# Altium PCB PCB2.PcbDoc
Units mil, origin at the board's own origin, x right, y up, seen from the top; angles counter-clockwise.
Board outline 3500 x 2000 mil, 2 copper layers (Top Layer, Bottom Layer), stack 61.756 mil thick; 18 components, 11 nets, 49 pads, 11 vias.
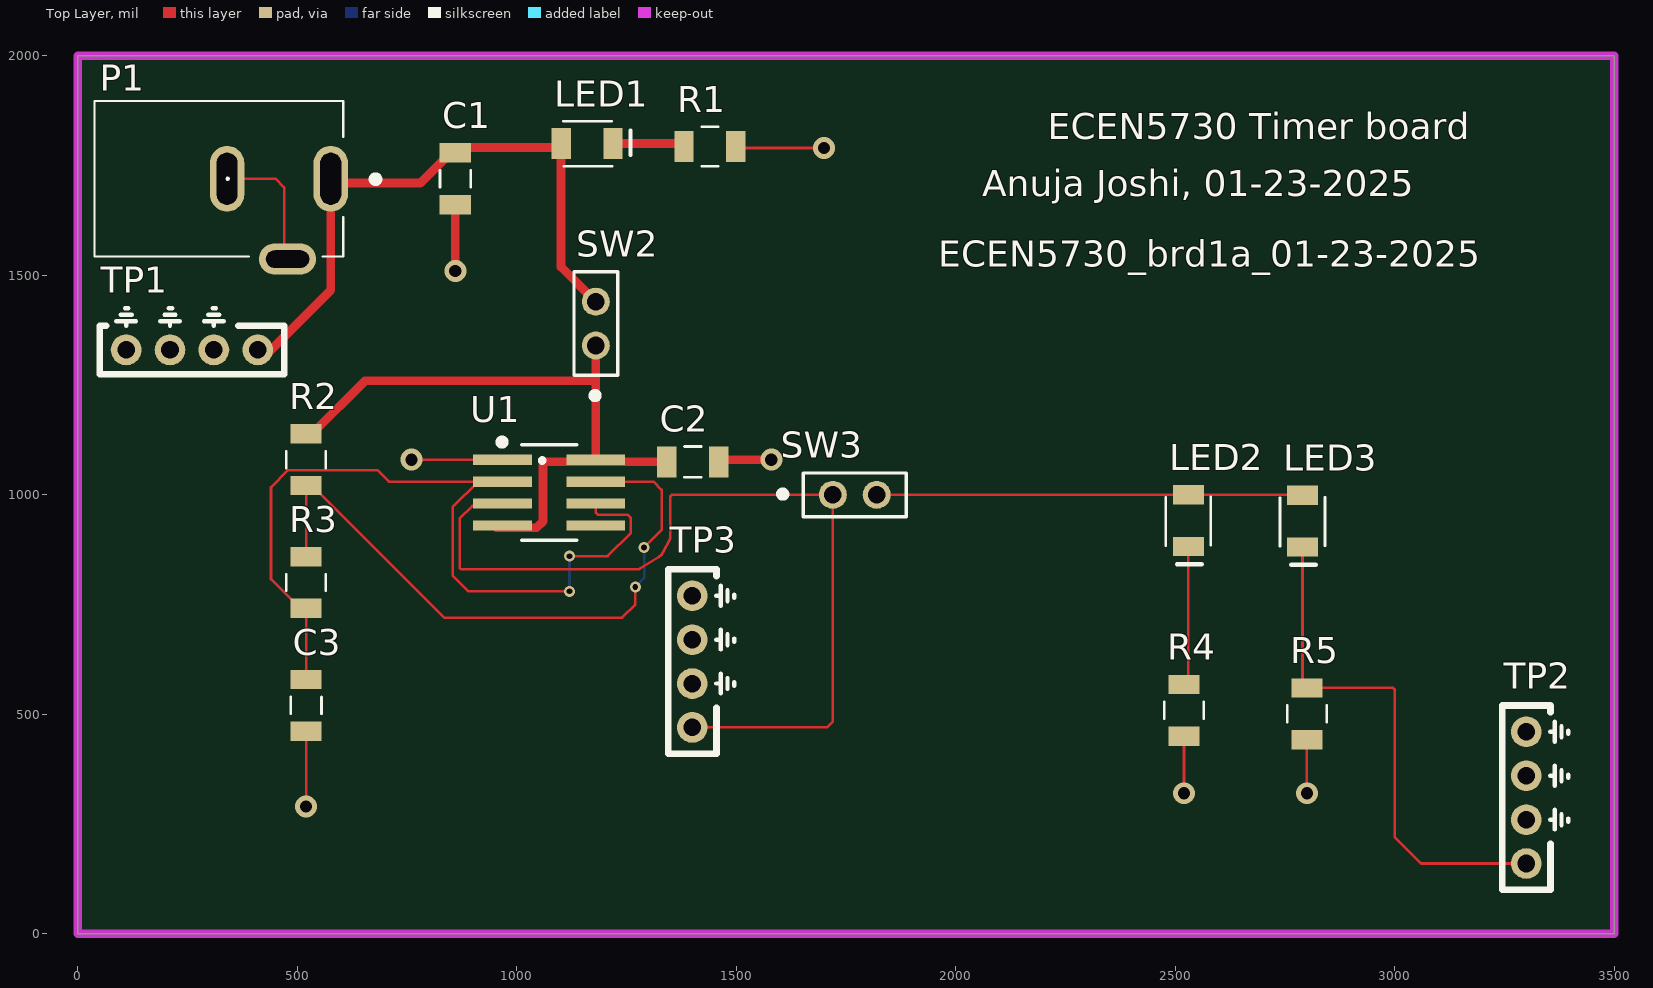
[diagram p0: Top Layer view]
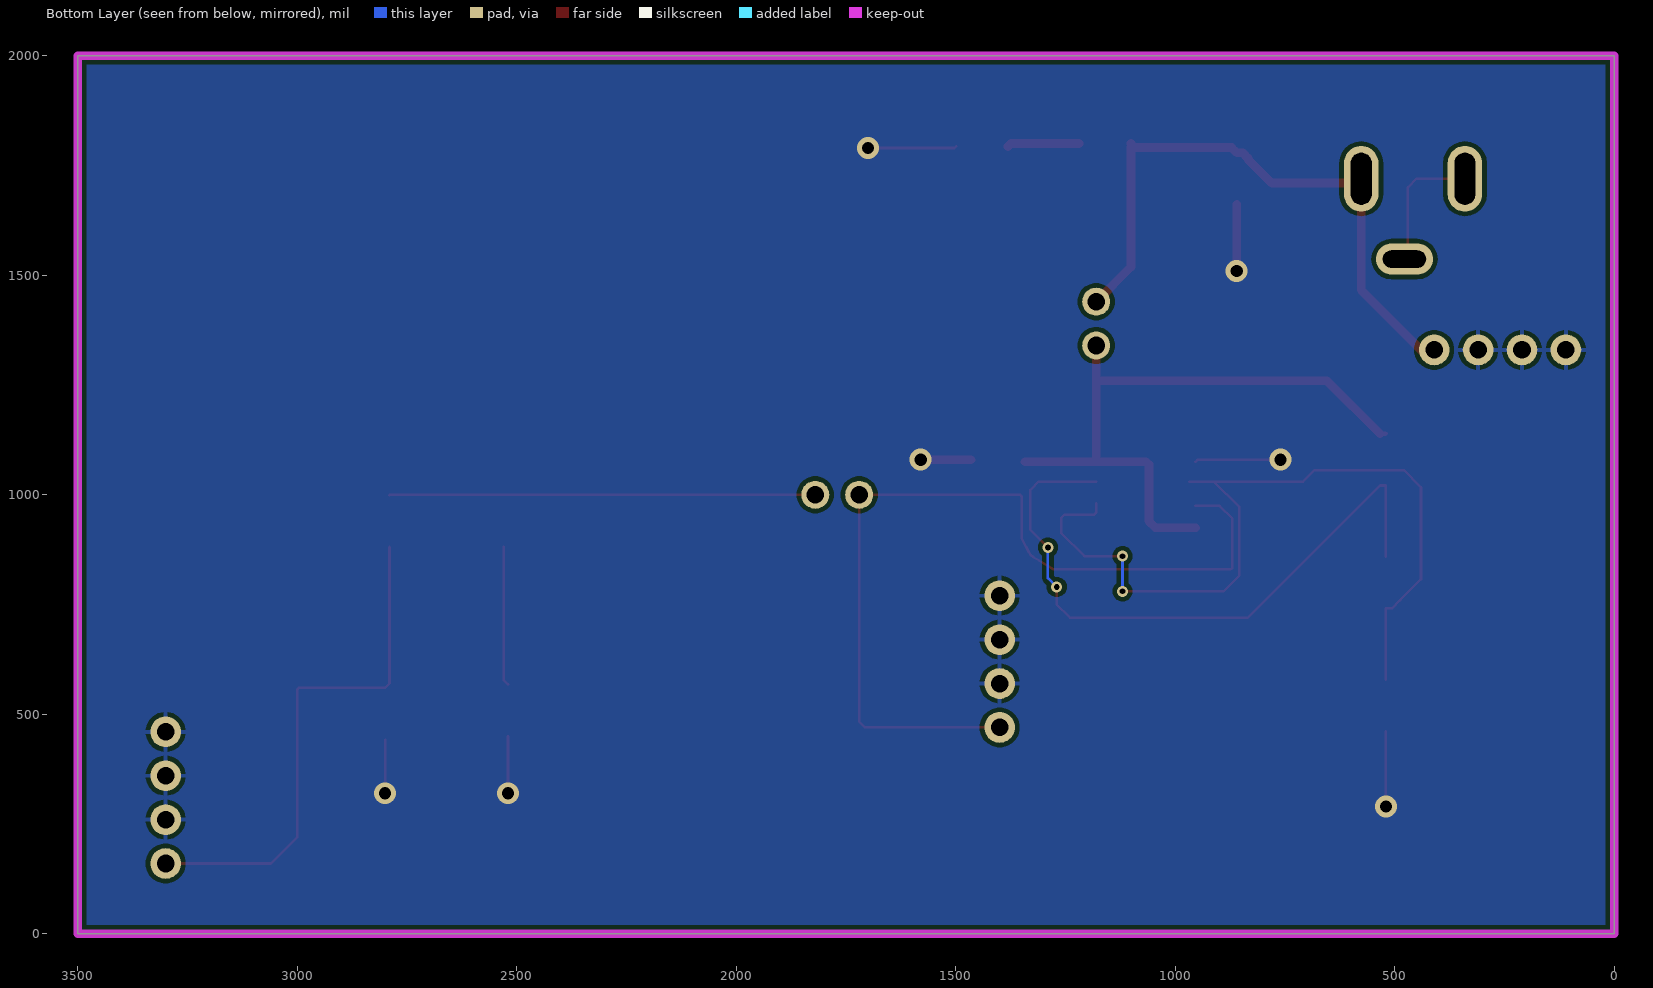
[diagram p1: Bottom Layer view, seen from below]
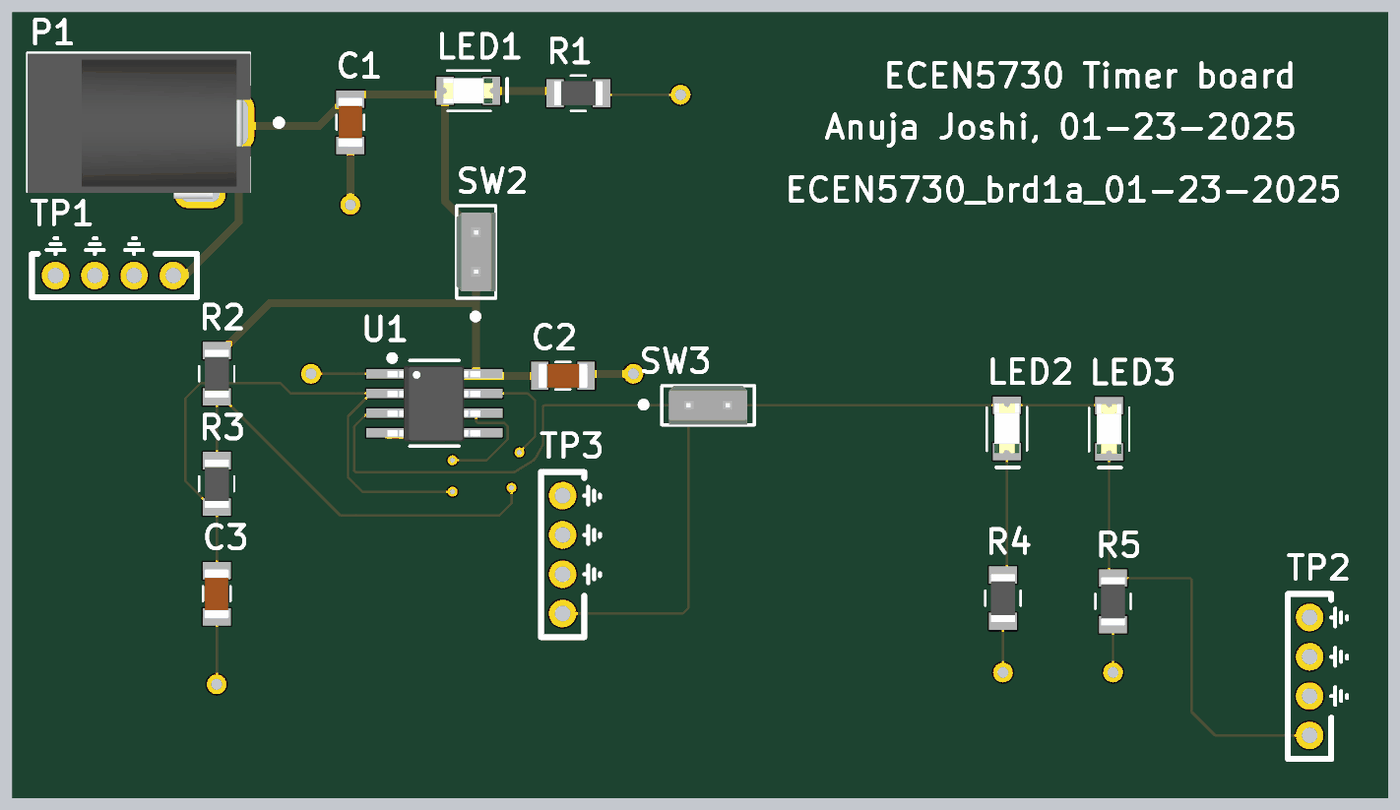
[diagram p2: 3D render of the assembled board from above, using the file's embedded part models]

## Layer stack, top to bottom
Top Solder: solder mask 1, SM-001, Dk 4
Top Layer: signal copper 1.378
Dielectric 1: core 59, Core-043, Dk 4.3
Bottom Layer: signal copper 1.378
Bottom Solder: solder mask 1, SM-001, Dk 4

## Board outline
0,0 3500,0 3500,2000 0,2000

## Design rules (kind name [scope] priority, off if disabled: settings)
BoardOutlineClearance [All] p1: gap=10 ignorepadtopadclearanceinfootprint=FALSE except(0: Arc-SplitContinuation Track-SplitContinuation SMDPad-SplitContinuation THPad-SplitContinuation Via-SplitContinuation Fill-SplitContinuation Poly-SplitContinuation Region-SplitContinuation Text-SplitContinuation)
Clearance [All] p1: gap=10 ignorepadtopadclearanceinfootprint=FALSE
PlaneClearance [All] p1: clearance=10
PlaneConnect [All] p1: planeconnectstyle=Direct reliefexpansion=20 reliefentries=4 reliefconductorwidth=10 reliefairgap=10
PolygonConnect [All] p1: thpad.connectstyle=Relief thpad.reliefconductorwidth=10 thpad.reliefentries=4 thpad.polygonreliefangle="90 Angle" thpad.airgapwidth=10 smdpad.connectstyle=Direct smdpad.reliefconductorwidth=10 smdpad.reliefentries=4 smdpad.polygonreliefangle="90 Angle" smdpad.airgapwidth=10 via.connectstyle=Direct via.reliefconductorwidth=10 via.reliefentries=4 via.polygonreliefangle="90 Angle" via.airgapwidth=10
RoutingVias [All] p1: holewidth=13 width=25 viastyle="Through Hole" minholewidth=13 minwidth=25 maxholewidth=60 maxwidth=80
SolderMaskExpansion [All] p1: expansion=4 istentingtop=FALSE
SupplyNets "Schematic Supply Nets_1" [InNet('+5')] p1: voltage=0.000
SupplyNets "Schematic Supply Nets" [InNet('GND')] p2: voltage=0.000
UnRoutedNet [All] p1: checkbadconnections=TRUE
Width "Schematic Width Constraint_1" [InNet('+5')] p1: maxlimit=100 minlimit=10 preferedwidth=20 minimp=50.000000 maximp=50.000000 favimp=50.000000
Width "Schematic Width Constraint" [InNet('NetC2_1')] p2: maxlimit=100 minlimit=10 preferedwidth=20 minimp=50.000000 maximp=50.000000 favimp=50.000000
Width [All] p3: maxlimit=100 minlimit=6 preferedwidth=6 minimp=50.000000 maximp=50.000000 favimp=50.000000
27 further rules are at their usual default settings.

## Components (designator, comment, footprint, x,y, rotation, side; value= is the part's Value field where it differs from the comment)
C1 "22uF" 1206_Passive_Capacitor 860,1720 r90 top
C2 "22uF" 1206_Passive_Capacitor 1401,1075 r0 top
C3 "1uF" 1206_Passive_Capacitor 520,520.31 r90 top
LED1 "Red" LED_1206 1160,1800 r0 top
LED2 "Red" LED_1206 2530,941 r270 top
LED3 "Red" LED_1206 2790,940 r270 top
P1 "Power Jack" Power_Jack 576.22,1720 r180 top value="CONN PWR JACK 2X5.5MM SOLDER"
R1 "1k" 1206_Passive_Resitor 1440,1793.7 r180 top value="1K Ohm"
R2 "1k" 1206_Passive_Resitor 520,1080 r90 top value="1K Ohm"
R3 "1k" 1206_Passive_Resitor 520,800.16 r90 top value="1K Ohm"
R4 "1k" 1206_Passive_Resitor 2520,509 r90 top value="1K Ohm"
R5 "300 Ohm" 1206_Passive_Resitor 2800,501 r90 top value=300Ohm
SW2 "SW_2Pin_100mil_Switch" 2Pin-Header-Conn 1180,1340 r90 top
SW3 "SW_2Pin_100mil_Switch" 2Pin-Header-Conn 1720,1000 r0 top
TP1 "TP_5V" TP10x_Probe 260,1330 r180 top
TP2 "10x Probe TP" TP10x_Probe 3300,310 r90 top
TP3 "10x Probe TP" TP10x_Probe 1400,620 r90 top
U1 "LMC555CMX/NOPB" TS555IDTTR 1073.7,1005 r0 top

## Footprints (in the part's own frame and the unit in brackets; to place one, negate y for a bottom-side part, rotate by r counter-clockwise, add the part's x,y. Pads: shape width x height; smd on the part's side, far side on the other; paste and mask are expansions set on the pad)
2Pin-Header-Conn [mm]
  round 1.62 hole 1.02: 1(0,0) 2(2.54,0)
  silkscreen extent -3.03,-1.27 4.26,1.26, body extent -1.27,-1.27 3.81,1.27, height 8.13
1206_Passive_Capacitor [mil]
  rect 44x71 smd: 1(-59,0) 2(59,0)
  silkscreen extent -19,-35 19,35, body extent -63,-31 63,32, height 50
1206_Passive_Resitor [mil]
  rect 44x71 smd: 1(-59,0) 2(59,0)
  silkscreen extent -19,-45 19,45, body extent -61,-31 61,31, height 26
LED_1206 [mil]
  rect 44x71 smd: 1(-59,0) 2(59,0)
  silkscreen extent -54,-51 99,51, body extent -63,-31 63,31, height 28
Power_Jack [mm]
  oval 2x3.8 hole 1.2 slot 3 at 90 deg: 1(0,0) 2(6,0)
  oval 3.3x1.8 hole 1 slot 2.5 at 0 deg: 3(2.5,4.65)
  silkscreen extent -2.79,-4.5 13.68,4.5, body extent -0.76,-4.45 13.64,4.95, height 11.49
TP10x_Probe [mil] "Small Probs footprint"
  round 70 hole 40: 1(-150,0) 2(-50,0) 2(50,0) 2(150,0)
  silkscreen extent -210,-95 210,55
TS555IDTTR [mm] "IC OSC Single Timer 2.7MHz 8SOIC"
  rect 3.4x0.6 smd: 1(-2.7,1.905) 2(-2.7,0.635) 3(-2.7,-0.635) 4(-2.7,-1.905) 5(2.7,-1.905) 6(2.7,-0.635) 7(2.7,0.635) 8(2.7,1.905)
  silkscreen extent -2.85,-2.77 1.6,3.05, body extent -3.03,-2.48 2.96,2.43, height 1.75

## Part data
C1 C2: library part C_22uF_1206, "22uF ±10% 25V X5R 1206 Multilayer Ceramic Capacitors MLCC - SMD/SMT RoHS", LCSC Part#=C12891, MFR Part #=CL31A226KAHNNNE, Datasheet=https://datasheet.lcsc.com/lcsc/1811031514_Samsung-Electro-Mechanics-CL31A226KAHNNNE_C12891.pdf, Type=basic
C3: library part C_1uF_0402, "MULTILAYER CERAMIC CAPACITORS MLCC - SMD/SMT 1UF 25V 0402 ROHS", LCSC Part#=C52923, MFR Part #=CL05A105KA5NQNC, Datasheet=https://datasheet.lcsc.com/szlcsc/Samsung-Electro-Mechanics-CL05A105KA5NQNC_C52923.pdf, Type=Basic
LED1 LED2 LED3: library part LED_RED_1206, "Red 621~631nm 1206 Light Emitting Diodes (LED) RoHS", LCSC Part#=C93133, MFR Part #=15-21/R6C-FQ1R1B/2T, Datasheet=https://datasheet.lcsc.com/szlcsc/1811151241_Everlight-Elec-15-21-R6C-FQ1R1B-2T_C93133.pdf, Type=Extended
P1: library part "P_Power Jack", "Power Barrel Connector Jack 2.10mm ID (0.083\"), 5.50mm OD (0.217\") Through Hole, Right Angle", LCSC Part#=C136744, MFR Part #=PJ-102A, Digikey Link=https://www.digikey.com/product-detail/en/PJ-102A/CP-102A-ND/275425/?itemSeq=304982367, Type=Extended
R1 R2 R3 R4: library part R_1K_1206, "CHIP RESISTOR - SURFACE MOUNT 1KOHMS ±1% 1/4W 1206 ROHS", LCSC Part#=C4410, MFR Part #=RNCP1206FTD1K00CT, Digikey Link=https://www.digikey.com/product-detail/en/RNCP1206FTD1K00/RNCP1206FTD1K00CT-ND/2240675/?itemSeq=304982373, Type=Basic
R5: library part R_300Ohm_1206, "CHIP RESISTOR - SURFACE MOUNT 300OHMS ±1% 1/4W 1206 ROHS", LCSC Part#=C17887, MFR Part #=1206W4F3000T5E, Datasheet=https://datasheet.lcsc.com/szlcsc/Uniroyal-Elec-1206W4F3000T5E_C17887.pdf, Type=Basic
SW2 SW3: "2Pin Header", LCSC Part#=C124375, Type=Extended
TP1 TP2 TP3: library part TP_10x_Probe, "Test Point 300 mil centers"
U1: library part U_555_Fast, "555 Type, Timer/Oscillator _Single_ IC 3MHz 8-SO", LCSC Part#=C90760, Package=SOIC-8, Digikey Link=https://www.digikey.com/product-detail/en/texas-instruments/LMC555CMX-NOPB/LMC555CMX-NOPBCT-ND/1010550, MFR Part #=LMC555CMX/NOPB, Type=Extended

## Via types
v1: diameter 50, hole 28, Top Layer to Bottom Layer, 7 vias
v2: diameter 25, hole 13, Top Layer to Bottom Layer, 4 vias

## Nets (pads, with @x,y where several pads share a name; then routed paths per layer and width w, separated by ;. In a path a pad name is that pad's centre, name@x,y a point inside that pad or via, vN(x,y) a via of type N, cw(c..) or ccw(c..) an arc to the next point about the centre after c; other vN are vias at no path point)
+5: C1.2 LED1.1 P1.1 SW2.2 TP1.1 | length 1397.8
  Top Layer w20: TP1.1@430,1320 576.22,1466.22 576.22,1710 780,1710 834.5,1764.5 834.5,1767 846.5,1779 C1.2 872,1791 1092,1791 LED1.1 ; LED1.1@1101,1791 1101,1519 SW2.2
GND: C1.1 C2.2 C3.1 R1.1 R4.1 R5.1 TP1.2 TP2.2 TP3.2 U1.1 | length 1094.7
  Top Layer w6: v1(520,290) C3.1 ; v1(760,1080) 948.7,1080 U1.1@953.7,1075 ; C2.2 C2.2@1465,1080 ; R1.1 1502.7,1790 v1(1700,1790) ; v1(2520,320) R4.1 ; v1(2800,320) R5.1
  Top Layer w20: v1(860,1510) C1.1 ; C2.2@1465,1080 v1(1580,1080)
NetC2_1: C2.1 R2.2 SW2.1 U1.4 U1.8 | length 1502
  Top Layer w10: R2.2 R2.2@533.5,1139 ; 1060,1069.14 1065.86,1075
  Top Layer w20: R2.2@533.5,1139 654.5,1260 1180,1260 ; U1.4@953.7,925 1045,925 1060,940 1060,1069.14 ; 1065.86,1075 1166.3,1075 U1.8@1178.19,1075 ; SW2.1 1180,1260 ; C2.1 U1.8@1178.19,1075 ; U1.8@1178.19,1075 1180,1076.81 1180,1260
NetC3_2: C3.2 R3.1 U1.2 U1.6 | length 1933.9
  Top Layer w6: C3.2 R3.1 506.5,741.16 487.5,760.16 440,807.66 440,1016.88 479.12,1056 682.7,1056 708.7,1030 U1.2@912.28,1030 ; U1.2 U1.2@912.28,1030 ; v2(1120,780) 890,780 854,816 854,971.72 U1.2@912.28,1030 ; v2(1120,860) 1207.12,860 1259.93,912.8 1259.93,947.2 1252.31,954.81 1184.38,954.81 1180,959.19 U1.6
  Bottom Layer w6: v2(1120,780) v2(1120,860)
NetLED1_2: LED1.2 R1.2 | length 164.6
  Top Layer w20: LED1.2 1374.7,1800 R1.2
NetLED2_1: LED2.1 LED3.1 SW3.2 | length 970.4
  Top Layer w6: SW3.2 LED2.1 2789,1000 LED3.1
NetLED2_2: LED2.2 R4.2 | length 318.1
  Top Layer w6: R4.2 2530,578 LED2.2
NetLED3_2: LED3.2 R5.2 TP2.1 | length 1187.9
  Top Layer w6: LED3.2 2790,570 R5.2 2996.49,560 3000,556.49 3000,220 3060,160 TP2.1
NetP1_2: P1.2 P1.3 | length 367.7
  Top Layer w6: P1.2@373.6,1670.79 340,1704.39 P1.2 450,1720 470,1700 470,1544.72 P1.3
NetR2_1: R2.1 R3.2 U1.7 | length 1492.7
  Top Layer w6: R3.2 R2.1 533.5,1021 834.5,720 1240,720 1270,750 v2(1270,790) ; U1.7 1311.12,1030 1330,1011.12 1330,920 v2(1290,880)
  Bottom Layer w6: v2(1270,790) 1290,810 v2(1290,880)
NetSW3_1: SW3.1 TP3.1 U1.3 | length 2031.3
  Top Layer w6: U1.3@953.7,975 898.58,975 870,946.42 870,833.51 873.51,830 1277.51,830 1323.39,858.3 ccw(c1310,880) 1332.37,867.77 1350,900 1350,996.49 1353.51,1000 SW3.1 1720,483.51 1706.49,470 TP3.1
pads on no net: U1.5

## Polygon pours and split planes (outlines as drawn)
GND on Bottom Layer "GND_L02_P000" (solid, pour order 0): 0,2000 3500,2000 3500,0 0,0

## Keep-outs
Keep-Out Layer:
  the board outline again, w20

## Silkscreen, mask and mechanical layers (free items; w line width, h text height)
Top Overlay:
  text "ECEN5730 Timer board" at 2210,1810 h60
  text "Anuja Joshi, 01-23-2025" at 2060,1679.99 h60
  text "ECEN5730_brd1a_01-23-2025" at 1960,1520 h60